# Altium PCB PCB2.PcbDoc
Units mm, origin at the board's own origin, x right, y up, seen from the top; angles counter-clockwise.
Board outline 73 x 48.5 mm, 2 copper layers (Top Layer, Bottom Layer); 64 components, 46 nets, 208 pads, 38 vias.
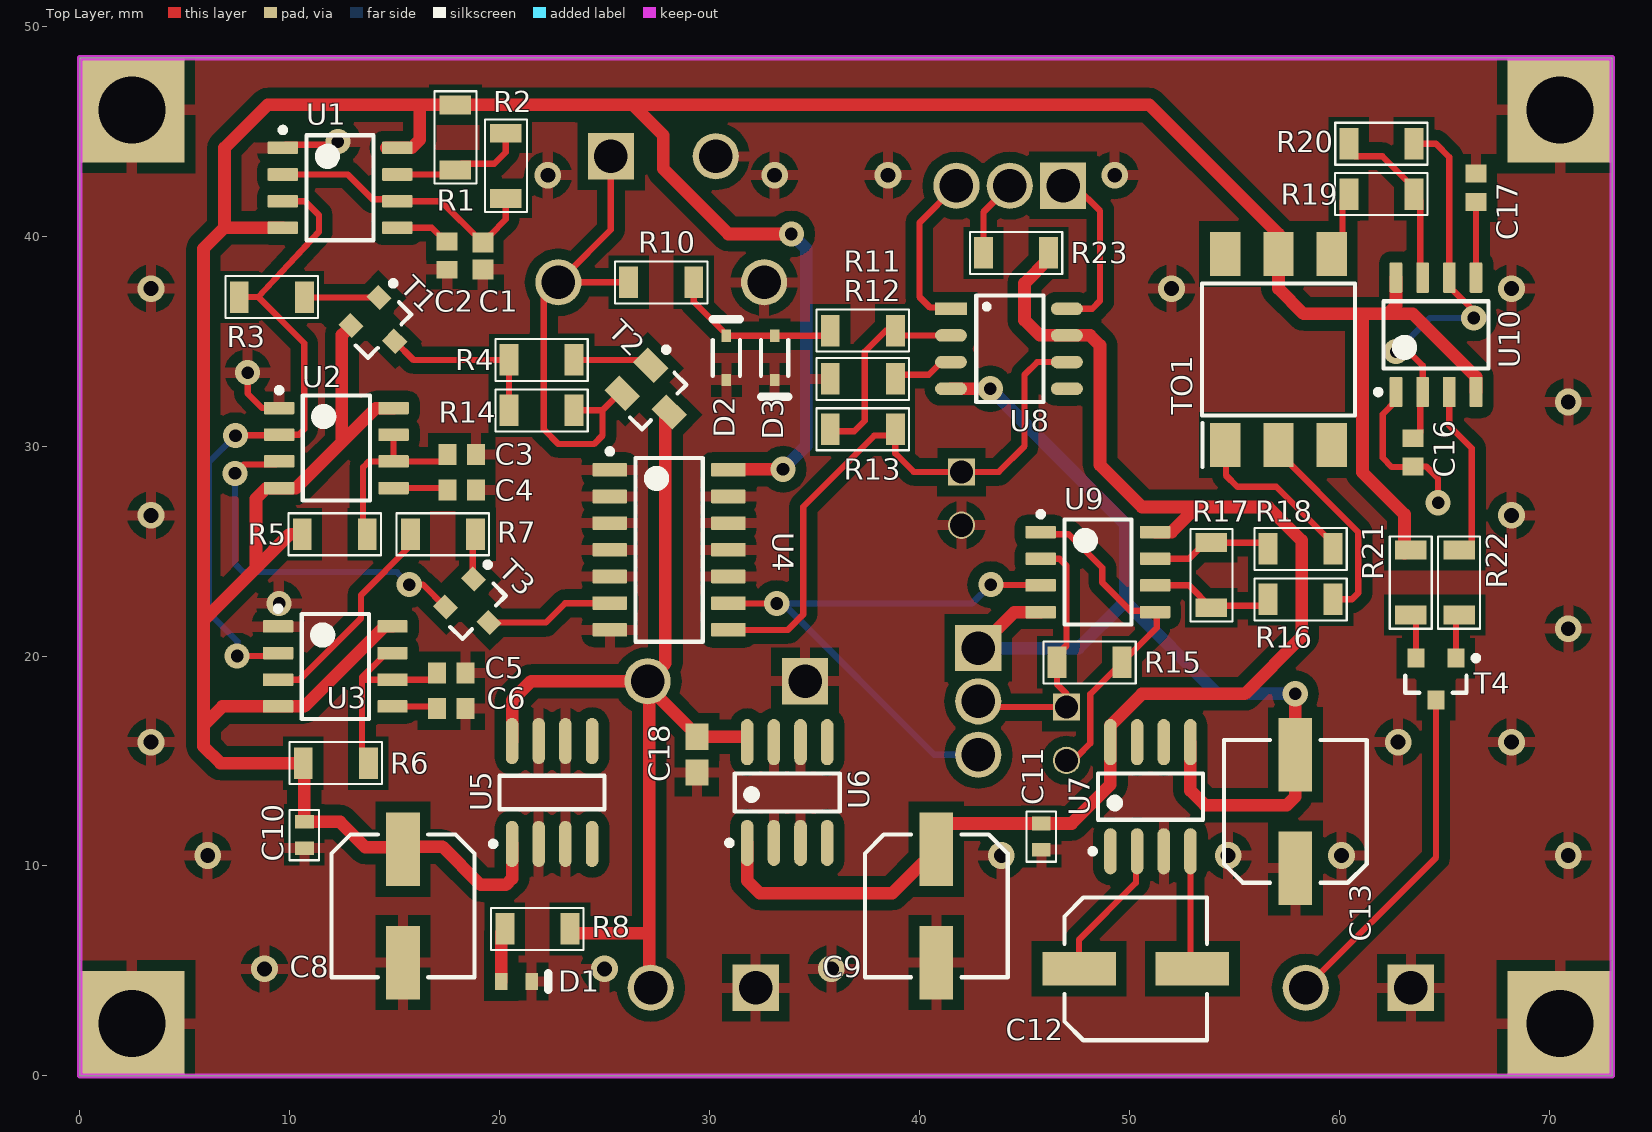
[diagram p0: Top Layer view]
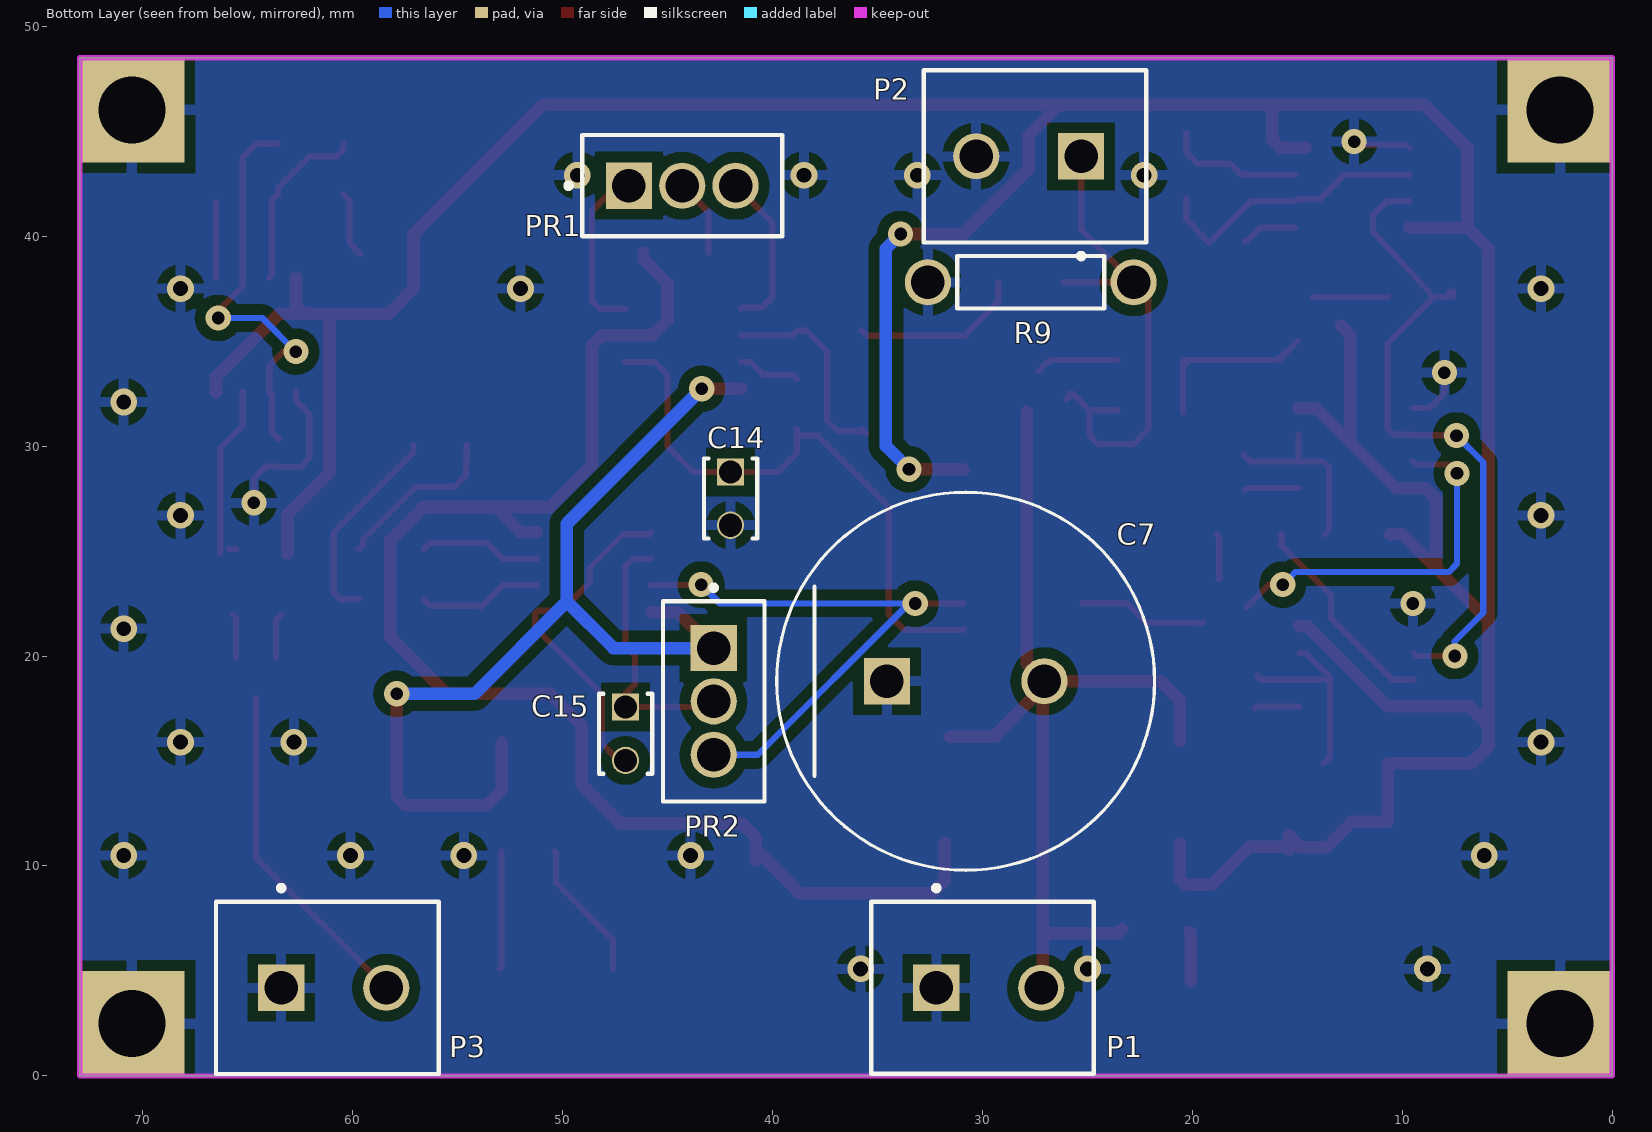
[diagram p1: Bottom Layer view, seen from below]
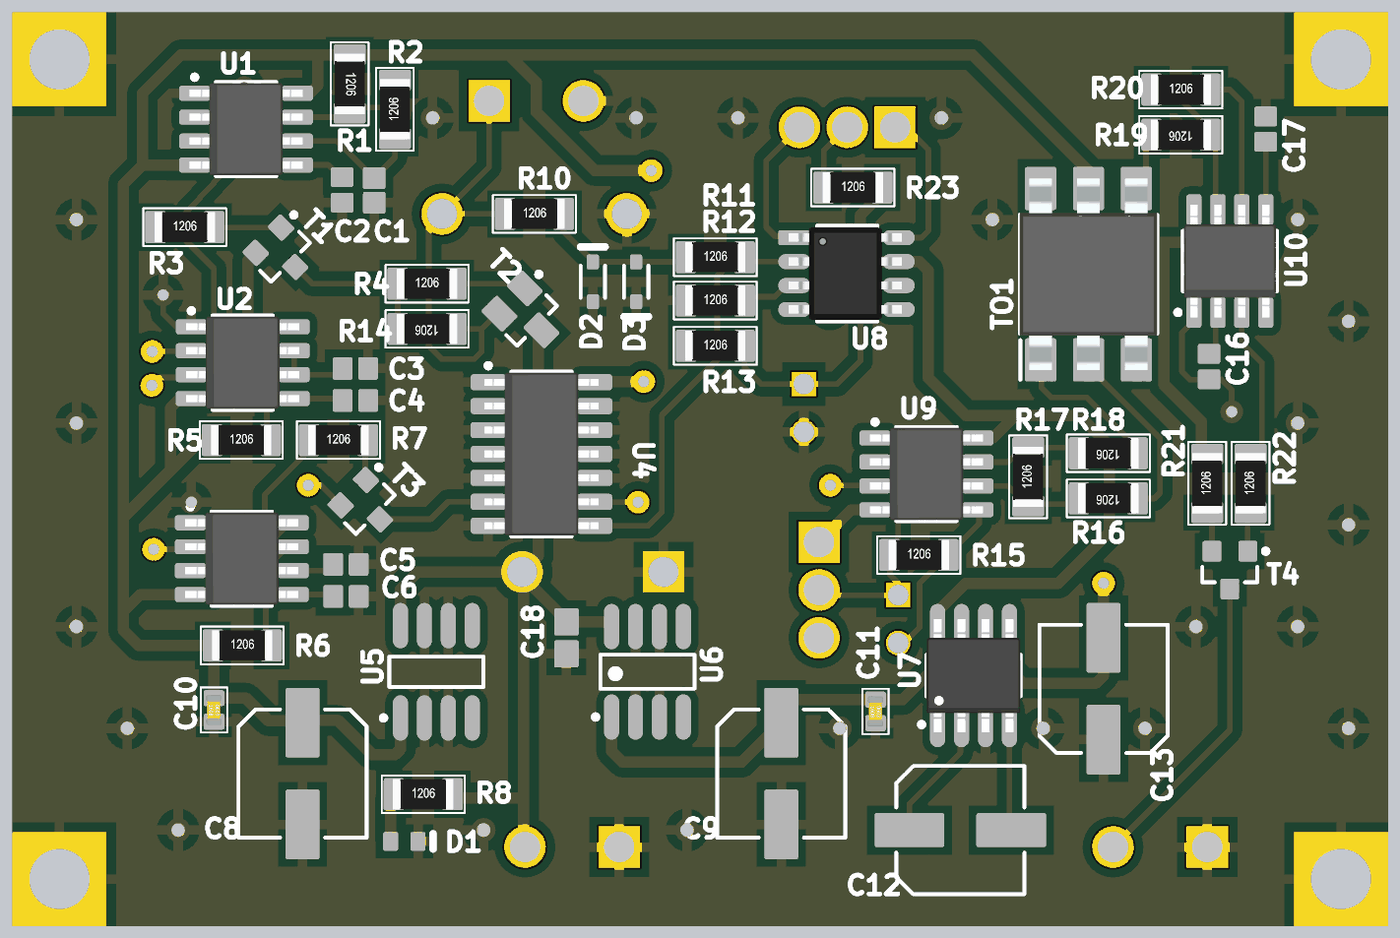
[diagram p2: 3D render of the assembled board from above, using the file's embedded part models]
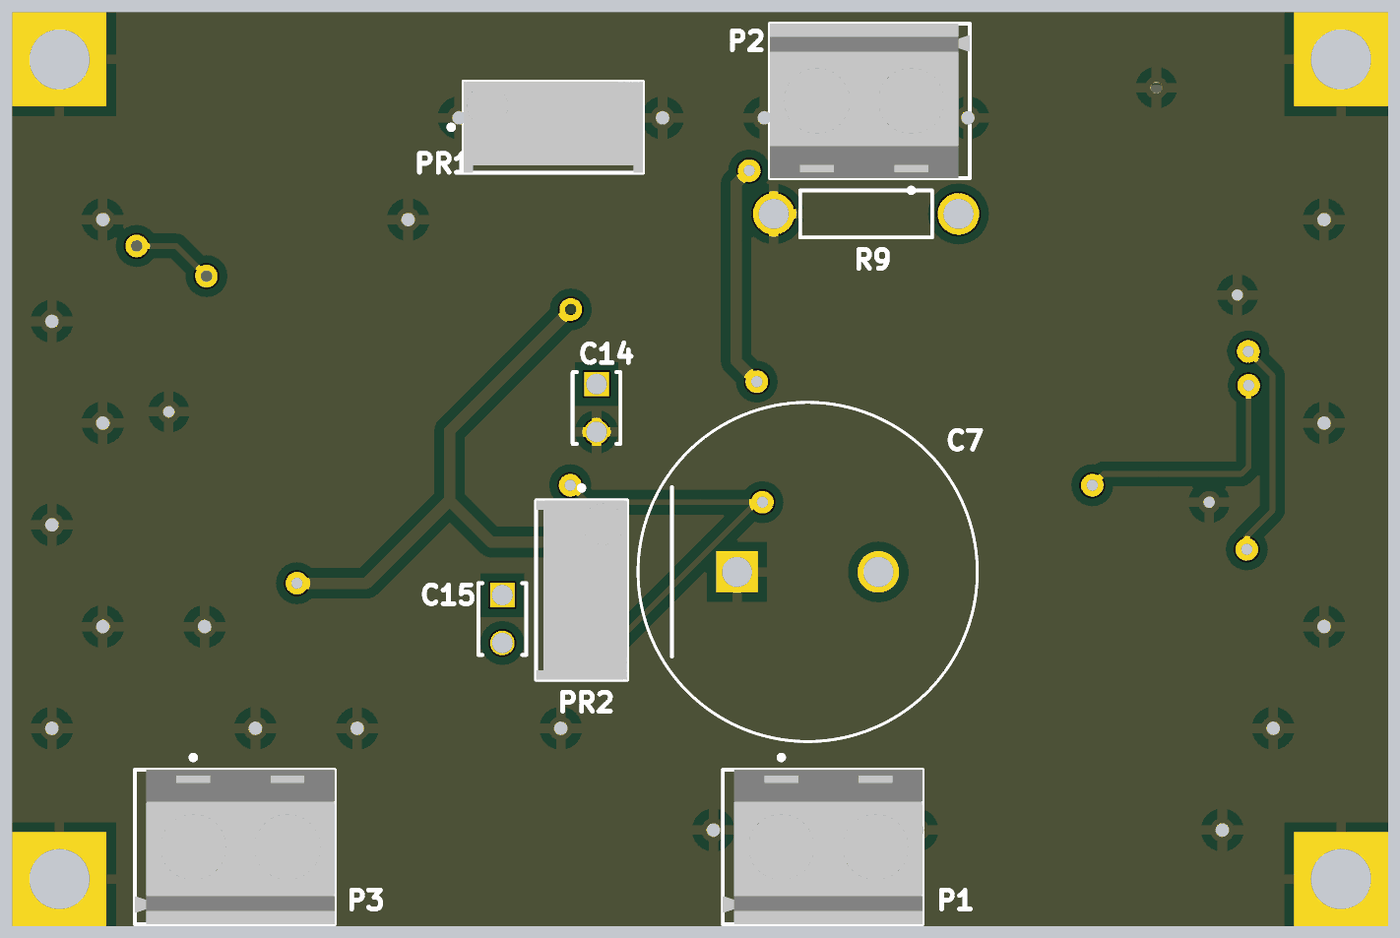
[diagram p3: 3D render of the assembled board from below, using the file's embedded part models]

## Layer stack, top to bottom
Top Solder: solder mask 0.0102, Solder Resist, Dk 3.5
Top Layer: signal copper 0.0356
Dielectric 1: dielectric 0.32, FR-4, Dk 4.8
Bottom Layer: signal copper 0.0356
Bottom Solder: solder mask 0.0102, Solder Resist, Dk 3.5

## Board outline
0,0 73,0 73,48.5 0,48.5

## Design rules (kind name [scope] priority, off if disabled: settings)
Clearance [All] p1: gap=0.508 ignorepadtopadclearanceinfootprint=TRUE except(0: Track-SMDPad Track-THPad Track-Hole)
HoleSize [All] p1: absolutevalues=TRUE maxlimit=6 minlimit=1 maxpercent=80.000 minpercent=20.000
HoleToHoleClearance [All] p1: gap=0.5 allowstackedmicrovias=TRUE
MinimumSolderMaskSliver [All] p1: minsoldermaskwidth=0.127
NetAntennae [All] p1: netantennaetolerance=0.1
PasteMaskExpansion [All] p1: expansion=0.1
PolygonConnect [All] p1: connectstyle=Relief reliefconductorwidth=0.5 reliefentries=4 polygonreliefangle="90 Angle" airgapwidth=0.5
RoutingVias [All] p1: holewidth=0.7 width=1.7 viastyle="Through Hole" minholewidth=0.6 minwidth=1.2 maxholewidth=1 maxwidth=2.2
SMDNeckDown [All] p1: percent=100.000
SilkToSilkClearance [All] p1: silktosilkclearance=0.1
SilkToSolderMaskClearance [IsPad] p1: minsilkscreentomaskgap=0.1 clearancetoexposedcopper=TRUE
SolderMaskExpansion [All] p1: expansion=0.102
Width [All] p1: maxlimit=5.08 minlimit=0.3 preferedwidth=0.762 minimp=50.000000 maximp=50.000000 favimp=50.000000
23 further rules are at their usual default settings.

## Classes and differential pairs
component class Designator: C7 C8 C9 C10 C11 C12 C13 C18 D1 P1 R8 U5 U6 U7

## Components (designator, comment, footprint, x,y, rotation, side; value= is the part's Value field where it differs from the comment)
C1 "VJ0603Y683KXJCW1BC" CAPC1608X95X40NL15T15 19.2,39.05 r90 top
C2 "VJ0603Y103KNAAO" CAPC1608X92X38NL15T08 17.5,39.075 r90 top
C3 "VJ0603Y103KNAAO" CAPC1608X92X38NL15T08 18.2,29.6 r180 top
C4 "VJ0603Y103KNAAO" CAPC1608X92X38NL15T08 18.2,27.9 r180 top
C5 "VJ0603Y103KNAAO" CAPC1608X92X38NL15T08 17.7,19.2 r180 top
C6 "VJ0603Y103KNAAO" CAPC1608X92X38NL15T08 17.7,17.5 r180 top
C7 "Cap Electrolytic" "18 X 25mm Radial 7.5mm" 30.8,18.8 r180 bottom
C8 "UUD1E470MCL1GS" NIC-CAPA2-6.3X5.8_V 15.4,8.1 r270 top
C9 "UUD1E470MCL1GS" NIC-CAPA2-6.3X5.8_V 40.8,8.1 r270 top
C10 "CL10B104KA8NNNC@TME" 0603 10.7,11.475 r270 top
C11 "CL10B104KA8NNNC@TME" 0603 45.8,11.4 r270 top
C12 "UUD1E470MCL1GS" NIC-CAPA2-6.3X5.8_V 50.3,5.1 r0 top
C13 "UUD1E470MCL1GS" NIC-CAPA2-6.3X5.8_V 57.9,12.6 r90 top
C14 "CC-470@TME" KEMT-C315-THT-2 42,27.5 r270 bottom
C15 "CM-220N@TME" KEMT-C315-THT-2 47,16.3 r270 bottom
C16 "VJ0603Y103KNAAO" CAPC1608X92X38NL15T08 63.5,29.7 r270 top
C17 "VJ0603Y103KNAAO" CAPC1608X92X38NL15T08 66.5,42.3 r90 top
C18 "0603YD334KAT2A" CAPC1608X90X35ML15T15 29.4,15.3 r270 top value=330nF
D1 "TLMS1000-GS08" VISH-TLMS1000_V 20.8,4.5 r0 top
D2 "1N4148" DIOD-SOD323-2-A_V 30.8,34.2 r90 top
D3 "1N4148" DIOD-SOD323-2-A_V 33.1,34.2 r270 top
P1 "282836-2@TME" TECO-282836-2_V 29.7,4.2 r180 bottom
P2 "282836-2 / SONDA" TECO-282836-2_V 27.8,43.8 r0 bottom
P3 "282836-2 / SPEAKER" TECO-282836-2_V 60.9,4.2 r180 bottom
PR1 "3296W-1-104LF@TME" BOUR-3296W 44.3,42.4 r180 bottom
PR2 "T910W-50R@TME" BOUR-3296W 42.8,17.84 r270 bottom
R1 "1206S4J0224T5E@TME" R1206 17.9,44.7 r270 top value=220K
R2 "1206S4J0222T5E@TME" R1206 20.3,43.35 r90 top value=2,2K
R3 "1206S4J0103T5E@TME" R1206 9.15,37.1 r0 top value=10K
R4 "1206S4J0220T5E@TME" R1206 22,34.1 r0 top value=22R
R5 "1206S4J0163T5E@TME" R1206 12.15,25.8 r0 top value=16K
R6 "1206S4J0123T5E@TME" R1206 12.2,14.9 r0 top value=12K
R7 "Resistor" R1206 17.3,25.8 r0 top value=10K
R8 "1206S4J0102T5E@TME" R1206 21.8,7 r0 top value=5K1
R9 "1W" OMTE-RES7X2.5-2 27.7,37.8 r180 bottom
R10 "Resistor" R1206 27.7,37.8 r0 top value=1K
R11 "Resistor" R1206 37.3,35.5 r0 top value=1K
R12 "Resistor" R1206 37.3,33.2 r0 top value=1K
R13 "Resistor" R1206 37.3,30.8 r0 top value=1K
R14 "1206S4J0102T5E@TME" R1206 22,31.7 r180 top value=1K
R15 "1206S4J0105T5E@TME" R1206 48.1,19.7 r0 top value=1M
R16 "1206S4J0102T5E@TME" R1206 58.15,22.7 r180 top value=1k
R17 "1206S4J0105T5E@TME" R1206 53.9,23.85 r90 top value=1M
R18 "1206S4J0271T5E@TME" R1206 58.15,25.1 r180 top value=270
R19 "1206S4J0103T5E@TME" R1206 62,42 r180 top value=10k
R20 "1206S4J0103T5E@TME" R1206 62,44.4 r0 top value=10K
R21 "1206S4J0220T5E@TME" R1206 63.4,23.5 r90 top value=22
R22 "1206S4J0103T5E@TME" R1206 65.7,23.5 r90 top value=10K
R23 "Resistor" R1206 44.6,39.2 r0 top value=1K
T1 "BC807" ONSC-SOT-23-3-318-08_V 14.3,35.7 r315 top
T2 "TN2540N8-G" FAIR-SOT23-3_A_V 27.3,32.4 r315 top
T3 "BC807-25LT1G" ONSC-SOT-23-3-318-08_V 18.8,22.3 r315 top
T4 "BC807" ONSC-SOT-23-3-318-08_V 64.6,18.9 r270 top
TO1 "CNY17" SOP254P1016X460-6N 57.1,34.6 r90 top
U1 "NE555D" D0008A_N 12.4,42.3 r0 top
U2 "NE555D" D0008A_N 12.225,29.905 r0 top
U3 "NE555D" D0008A_N 12.175,19.505 r0 top
U4 "CD4066BM96" D0014A_M 28.075,25.06 r0 top
U5 "L78L08ACD13TR@TME" SO8_M 22.5,13.5 r90 top
U6 "L78L05ABD13TR@TME" SO8_N 33.7,13.5 r90 top
U7 "ICL7660SCBA" INTS-SOIC-8_V 51,13.3 r90 top
U8 "NE5534" "NE5534 FIXED" 41.5,36.54 r0 top
U9 "TL062CDR" D0008A_N 48.5,24 r0 top
U10 "NE555D" D0008A_N 64.6,35.3 r90 top

## Footprints (in the part's own frame and the unit in brackets; to place one, negate y for a bottom-side part, rotate by r counter-clockwise, add the part's x,y. Pads: shape width x height; smd on the part's side, far side on the other; paste and mask are expansions set on the pad)
"18 X 25mm Radial 7.5mm" [mm] "(18 X 25mm) Radial 7.5mm Cap Aluminum 2200uF 35V 20% 2740mA 5000h 105°C Ammo Pack"
  rect 2.2x2.2 hole 1.6 paste-1000 mask+0: 1(-3.75,0)
  round 2.2 hole 1.6 paste-1000 mask+0: 2(3.75,0)
  silkscreen extent -9,-9 9,9
0603 [mm]
  rect 0.65x0.9 smd: 1(-0.625,0) 2(0.625,0)
  silkscreen extent -1.2,-0.7 1.2,0.7, body extent -0.8,-0.4 0.8,0.4, height 0.8
BOUR-3296W [mm] "THD, 3-Leads, Body 9.53x4.83mm, Pitch 2.54mm"
  rect 2.2x2.2 hole 1.6: 1(-2.54,0)
  round 2.2 hole 1.6: 2(0,0) 3(2.54,0)
  silkscreen extent -5.54,-2.41 4.77,2.42, body extent -4.76,-2.41 4.76,2.42, height 11.55
CAPC1608X90X35ML15T15 [mm] "Chip Capacitor, 2-Leads, Body 1.60x0.81mm, IPC Low Density"
  rect 1.25x1.1 smd: 1(-0.85,0) 2(0.85,0)
  body extent -0.88,-0.48 0.88,0.48, height 0.9
CAPC1608X92X38NL15T08 [mm] "Chip Capacitor, 2-Leads, Body 1.60x0.80mm, IPC Medium Density"
  rect 0.85x1 smd: 1(-0.675,0) 2(0.675,0)
  body extent -0.88,-0.48 0.88,0.48, height 0.92
CAPC1608X95X40NL15T15 [mm] "Chip Capacitor, 2-Leads, Body 1.60x0.80mm, IPC Medium Density"
  rect 0.95x1 smd: 1(-0.65,0) 2(0.65,0)
  body extent -0.87,-0.48 0.88,0.47, height 0.95
D0008A_N [mm] "SOIC, 8-Leads, Body 5x4mm, Pitch 1.27mm, IPC Medium Density"
  rrect17% 1.45x0.6 smd: 1(-2.725,1.905) 2(-2.725,0.635) 3(-2.725,-0.635) 4(-2.725,-1.905) 5(2.725,-1.905) 6(2.725,-0.635) 7(2.725,0.635) 8(2.725,1.905)
  silkscreen extent -2.85,-2.5 1.6,2.88, body extent -3,-2.45 3,2.45, height 1.63
D0014A_M [mm] "SOIC, 14-Leads, Body 8.75x4mm, Pitch 1.27mm, IPC Low Density"
  rrect15% 1.65x0.65 smd: 1(-2.825,3.81) 2(-2.825,2.54) 3(-2.825,1.27) 4(-2.825,0) 5(-2.825,-1.27) 6(-2.825,-2.54) 7(-2.825,-3.81) 8(2.825,-3.81) 9(2.825,-2.54) 10(2.825,-1.27) 11(2.825,0) 12(2.825,1.27) 13(2.825,2.54) 14(2.825,3.81)
  silkscreen extent -2.95,-4.38 1.6,4.81, body extent -3.02,-4.32 3.02,4.32, height 1.59
DIOD-SOD323-2-A_V [mm] "SOD-323, 2-Leads, Body 1.7x1.3mm"
  rect 0.59x0.45 smd: 1(-1.055,0) 2(1.055,0)
  silkscreen extent -0.85,-0.65 1.85,0.65, body extent -0.85,-0.65 0.85,0.65, height 1.2
FAIR-SOT23-3_A_V [mm] "SOT23, 3-Leads, Body 3.04x1.52mm, Pitch 0.95mm"
  rect 1.4x1 smd: 1(-1.1,0.95) 2(-1.1,-0.95) 3(1.1,0)
  silkscreen extent -1.22,-1.5 0.76,2.12, body extent -0.76,-1.52 0.76,1.52, height 1.12
INTS-SOIC-8_V [mm] "SOIC, 8-Leads, Body 5x4mm, Pitch 1.27mm"
  oval 2.2x0.6 smd: 1(-2.6,1.905) 2(-2.6,0.635) 3(-2.6,-0.635) 4(-2.6,-1.905) 5(2.6,-1.905) 6(2.6,-0.635) 7(2.6,0.635) 8(2.6,1.905)
  silkscreen extent -2.72,-2.5 1.1,2.88, body extent -3,-2.5 3,2.5, height 1.75
KEMT-C315-THT-2 [mm] "THD, 2-Leads, Body 3.81x2.54mm"
  rect 1.3x1.3 hole 1.1: 1(-1.27,0)
  round 1.3 hole 1.1: 2(1.27,0)
  silkscreen extent -1.91,-1.27 1.9,1.27, body extent -1.91,-1.27 1.91,1.27, height 4.66
"NE5534 FIXED" [mm]
  rect 1.52x0.6 smd: 1(0,0)
  oval 1.52x0.6 smd: 2(0,-1.27) 3(0,-2.54) 4(0,-3.81) 5(5.52,-3.81) 6(5.52,-2.54) 7(5.52,-1.27) 8(5.52,0)
  silkscreen extent 1.2,-4.44 4.4,0.64, body extent -0.3,-4.35 5.7,0.55, height 1.7
NIC-CAPA2-6.3X5.8_V [mm] "Aluminum Electrolytic Capacitor, Diameter 6.3mm, Height 6.1mm, Pitch 5.4mm"
  rect 3.5x1.6 smd: 1(-2.7,0) 2(2.7,0)
  silkscreen extent -3.4,-3.4 3.4,3.4, body extent -3.14,-3.12 3.14,3.15, height 6.1
OMTE-RES7X2.5-2 [mm] "Resistor, Axial; Body 7x2.5mm, Lead Dia. 0.6mm"
  round 2.2 hole 1.6: 1(-4.9,0) 2(4.9,0)
  silkscreen extent -3.5,-1.25 3.5,1.25, body extent -3.5,-1.25 3.5,1.24, height 2.5
ONSC-SOT-23-3-318-08_V [mm] "SOT23, 3-Leads, Body 2.92x1.3mm, Pitch 0.95mm"
  rect 0.9x0.8 smd: 1(-1,0.95) 2(-1,-0.95) 3(1,0)
  silkscreen extent -1.12,-1.46 0.65,2.02, body extent -0.65,-1.46 0.65,1.46, height 1.11
R1206 [mm]
  rect 0.9x1.5 smd: 1(-1.55,0) 2(1.55,0)
  silkscreen extent -2.2,-1 2.2,1, body extent -1.6,-0.8 1.6,0.8, height 0.6
SO8_M [mm] "SOIC, 8-Leads, Body 4.9x3.9mm, Pitch 1.27mm, IPC Low Density"
  oval 2.2x0.6 smd: 1(-2.45,1.905) 2(-2.45,0.635) 3(-2.45,-0.635) 4(-2.45,-1.905) 5(2.45,-1.905) 6(2.45,-0.635) 7(2.45,0.635) 8(2.45,1.905)
  silkscreen extent -2.57,-2.5 0.8,2.93, body extent -2,-2.5 2,2.5, height 1.75
SO8_N [mm] "SOIC, 8-Leads, Body 4.9x3.9mm, Pitch 1.27mm, IPC Medium Density"
  oval 2.2x0.6 smd: 1(-2.4,1.905) 2(-2.4,0.635) 3(-2.4,-0.635) 4(-2.4,-1.905) 5(2.4,-1.905) 6(2.4,-0.635) 7(2.4,0.635) 8(2.4,1.905)
  silkscreen extent -2.52,-2.5 0.9,2.88, body extent -2,-2.5 2,2.5, height 1.75
SOP254P1016X460-6N [mm]
  rect 2.1x1.45 smd: 1(-4.55,2.54) 2(-4.55,0) 3(-4.55,-2.54) 4(4.55,-2.54) 5(4.55,0) 6(4.55,2.54)
  silkscreen extent -5.6,-3.65 3.15,3.65, body extent -5.08,-3.65 5.08,3.65, height 4.6
TECO-282836-2_V [mm] "Female Header, Pitch 5mm, 1 x 2 Position, Height 10mm"
  rect 2.2x2.2 hole 1.6: 1(-2.5,0)
  round 2.2 hole 1.6: 2(2.5,0)
  silkscreen extent -5.6,-4.1 5,4.87, body extent -5.6,-4.1 5,4.1, height 10
VISH-TLMS1000_V [mm] "SMD, 2-Leads, Body 0.8x1.6mm"
  rect 0.6x0.8 smd: 1(-0.725,0) 2(0.725,0)
  silkscreen extent 1.52,-0.4 1.52,0.4, body extent -0.8,-0.4 0.8,0.4, height 0.65

## Part data
C1: library part CMP-2006-01832-1, Capacitance=68nF, Manufacturer=Vitramon, Part Number=VJ0603Y683KXJCW1BC
C2 C3 C4 C5 C6 C17: library part CMP-2006-01968-1, Capacitance=10nF, Manufacturer=Vitramon, Part Number=VJ0603Y103KNAAO
C7: "CAPACITOR ALUM 2200UF 20% 35V RADIAL", Capacitance=2200uF
C8 C9 C12 C13: library part CMP-0687-00039-1, "Aluminum Electrolytic Capacitor, UD Series, Low Impedance, 47 uF, 25 V, + / - 20%, -55 to 105 degC, Chip Type, 6.3 x 5.8 mm D x L, Pb-Free, Reel", Manufacturer=Nichicon, Rated Capacitance="47 uF", Rated Ripple Current (at 100kHz)="230 mA", Rated Voltage="25 V", Tolerance Rated Capacitance="-20 to 20%", ComponentLink1Description="Manufacturer URL", ComponentLink1URL=http://www.nichicon.co.jp/, ComponentLink2Description=Datasheet, ComponentLink2URL=http://products.nichicon.co.jp/en/pdf/XJA043/e-ud.pdf, ComponentLink3Description="Package Specification", ComponentLink3URL=http://products.nichicon.co.jp/en/pdf/XJA043/e-ud.pdf, DatasheetVersion=08/2012, Diameter="6.3 mm", Endurance Time="2000 h", Impedance="0.44 Ohm", Length="5.8 mm", Mounting Technology="Surface Mount", PackageDescription="2-Pin Surface Mount Device, Diameter 6.3 mm, Height 5.8 mm, Pitch 5.4 mm", PackageReference=CAPAE-D6.3H5.8, Packing="Dia382mm Reel", PartNumber=UUD1E470MCL1GS, RoHS=TRUE
C10 C11: library part Cap, "Capacitor", Capacitance=100nF
C14: library part CMP-1664-00008-1, "Capacitor, Ceramic, 22 pF, +/-10 %, 100 V, -55 to 125 degC, 2-Pin THD, RoHS, Bulk", Capacitance=470pF, Case\Package=TO-220, Max Input Voltage="40 V", Max Operating Temperature="125 degC", Max Ouput Current="1.5 A", Min Input Voltage="4.2 V", Min Operating Temperature="0 degC", Output Voltage="1.2 V", Package Quantity=50, ComponentLink1Description="Manufacturer URL", ComponentLink1URL=http://www.kemet.com/, ComponentLink2Description=Datasheet, ComponentLink2URL=http://capacitoredge.kemet.com/capedge2/DataSheet/Datasheet-C315C220K1G5TA.pdf?pn=C315C220K1G5TA{BULK}, DatasheetVersion=Aug-16, Height="9.28 mm", Length="10.28 mm", Mount="Through Hole", Output Current="1.5 A", Outputs=1, PackageDescription="2-Pin Through Hole Device, Body 3.81 x 2.54 mm", PackageReference=C315-THT-2, Packaging=Rail/Tube, Pins=3, Radiation Hardening=No, REACH SVHC="No SVHC", RoHSCompliant=true, Weight="0.08113 oz", Width="4.82 mm"
C15: library part CMP-1664-00008-1, "Model: C315C220K1G5TA", Capacitance=220nF, Case\Package=TO-220, Max Input Voltage="40 V", Max Operating Temperature="125 degC", Max Ouput Current="1.5 A", Min Input Voltage="4.2 V", Min Operating Temperature="0 degC", Output Voltage="1.2 V", Package Quantity=50, ComponentLink1Description="Manufacturer URL", ComponentLink1URL=http://www.kemet.com/, ComponentLink2Description=Datasheet, ComponentLink2URL=http://capacitoredge.kemet.com/capedge2/DataSheet/Datasheet-C315C220K1G5TA.pdf?pn=C315C220K1G5TA{BULK}, DatasheetVersion=Aug-16, Height="9.28 mm", Length="10.28 mm", Mount="Through Hole", Output Current="1.5 A", Outputs=1, PackageDescription="2-Pin Through Hole Device, Body 3.81 x 2.54 mm", PackageReference=C315-THT-2, Packaging=Rail/Tube, Pins=3, Radiation Hardening=No, REACH SVHC="No SVHC", RoHSCompliant=true, Weight="0.08113 oz", Width="4.82 mm"
C16: library part CMP-2006-01968-1, Capacitance=22nF, Manufacturer=Vitramon, Part Number=VJ0603Y103KNAAO
C18: library part CMP-2006-04538-1, Manufacturer="AVX Interconnect / Elco", Part Number=0603YD334KAT2A
D1: library part CMP-2000-07254-1, "Low Current LED, 40 mW, 1.8 V, -40 to 100 degC, 2-Pin SMD (0603), RoHS, Tape and Reel", Forward Current If=2mA, Forward Voltage=1.8V, LED Colour=Red, Manufacturer=Vishay, Package Description="2-Pin Surface Mount Device, Body 1.6 x 0.8 mm", Package Reference=TLMS1000, Automotive Qualification Standard=AEC-Q100, Bulb Size=1.6mmx0.8mm, Datasheet URL=https://datasheet.ciiva.com/5798/1698881-5798337.pdf, Datasheet Version="Rev. 1.7, 02/2011", LED Mounting=SMD, Lens Shape=Rectangular, Luminous Intensity=4mcd, Manufacturer URL=http://www.vishay.com/, Mounting Technology=SurfaceMount, MSL=MSL2-1year, Packaging=CutTape, Product Range=-, SVHC=ToBeAdvised, Viewing Angle=80°, Wavelength Typ=636nm
D2 D3: library part CMP-1667-00004-1, "1N4148WS-7-F / Fast Switching Diode, 75 V, 0.3 A, -65 to 150 degC, 2-Pin SOD323, RoHS, Tape and Reel", ComponentLink1Description="Manufacturer URL", ComponentLink1URL=http://www.diodes.com/, ComponentLink2Description=Datasheet, ComponentLink2URL=http://www.diodes.com/datasheets/ds30097.pdf, DatasheetVersion="Rev. 25-2, 03/2016", PackageDescription="2-Pin Small Outline Diode, Body 1.7 x 1.3 mm", PackageReference=SOD323-2
P1 P2 P3: library part CMP-1684-00017-1, "Female Header, Pitch 5 mm, 1 x 2 Position, Height 10 mm, Tail Length 3.5 mm, Rohs, Bulk", Color=Green, Current=13.5A, Manufacturer="TE Connectivity", Package Description="Female Header, Pitch 5 mm, 1 x 2 Position, Height 10 mm, Tail Length 3.5 mm", Package Reference=THD, Standard Package=300, Voltage=300V, 3D Model=282836-2.pdf, Category=Connectors,Interconnects, Clamp Material - Plating=Brass-NickelPlated, Contact Material - Plating=Brass-TinPlated, Datasheet URL=http://www.te.com.cn/commerce/DocumentDelivery/DDEController?Action=showdoc&DocId=Catalog+Section%7F1308389_EUROSTYLE_TERMINAL_BLOCKS%7F0607%7Fpdf%7FEnglish%7FENG_CS_1308389_EUROSTYLE_TERMINAL_BLOCKS_0607.pdf%7F282836-2, Dynamic Catalog=BuchananSeries, Family=TerminalBlocks-WiretoBoard, Featured Product=EurostyleTerminalBlockConnectors, Features=Interlocking(Side), Housing Material=Polyamide(PA66),Nylon6/6, Manufacturer URL=http://www.te.com, Mating Orientation=HorizontalwithBoard, Mounting Type=ThroughHole, Number of Levels=1, Other Names="5ULV-02B / A98076", Packaging=Bulk, Pitch="0.197\"(5.00mm)", Positions Per Level=2, Product Training Modules=Wire-to-BoardEurostyleTerminalBlocks, RoHS Information=282836-2StatementofCompliance, Screw Material - Plating=Brass-NickelPlated, Screw Thread=M3, Series=Buchanan, Torque - Screw=0.68Nm(6Lb-In), Wire Gauge=16-30AWG, Wire Termination=Screw-RisingCageClamp
PR1: library part CMP-1747-00001-1, "Square Trimpot(R) Trimming Potentiometer, 10 KOhm, +/- 10%, 0.5 W, -55 to 125 degC, 3-Pin THD, RoHS, Tube", Case\Package=0603, Case Code (Metric)=1608, Max Operating Temperature="155 degC", Min Operating Temperature="-55 degC", Package Quantity=5000, Power Rating="100 mW", Resistance=100k, Tolerance=1%, Type (Resistor)="Thick Film", Voltage Rating="75 V", Case Code (Imperial)=0603, ComponentLink1Description="Manufacturer URL", ComponentLink1URL=http://www.bourns.com/, ComponentLink2Description=Datasheet, ComponentLink2URL=http://www.bourns.com/docs/Product-Datasheets/3296.pdf, DatasheetVersion=May-16, Height="0.45 mm", Length="1.55 mm", Mount="Surface Mount", PackageDescription="3-Pin Through Hole Device, Body 9.53 x 4.83 mm, Pitch 2.54 mm", PackageReference=3296W, Packaging="Tape and Reel", Pins=2, Radiation Hardening=No, REACH SVHC=Unknown, RoHSCompliant=true, Weight="7.1E-05 oz", Width="0.85 mm"
PR2: library part CMP-1747-00001-1, "Square Trimpot(R) Trimming Potentiometer, 10 KOhm, +/- 10%, 0.5 W, -55 to 125 degC, 3-Pin THD, RoHS, Tube", Case\Package=0603, Case Code (Metric)=1608, Max Operating Temperature="155 degC", Min Operating Temperature="-55 degC", Package Quantity=5000, Power Rating="100 mW", Resistance=470, Tolerance=1%, Type (Resistor)="Thick Film", Voltage Rating="75 V", Case Code (Imperial)=0603, ComponentLink1Description="Manufacturer URL", ComponentLink1URL=http://www.bourns.com/, ComponentLink2Description=Datasheet, ComponentLink2URL=http://www.bourns.com/docs/Product-Datasheets/3296.pdf, DatasheetVersion=May-16, Height="0.45 mm", Length="1.55 mm", Mount="Surface Mount", PackageDescription="3-Pin Through Hole Device, Body 9.53 x 4.83 mm, Pitch 2.54 mm", PackageReference=3296W, Packaging="Tape and Reel", Pins=2, Radiation Hardening=No, REACH SVHC=Unknown, RoHSCompliant=true, Weight="7.1E-05 oz", Width="0.85 mm"
R1 R2 R3 R4 R8 R14 R15 R16 R17 R18 R19 R20 R21 R22: library part Res, "Resistor"
R5 R6: library part Res2, "Resistor", LatestRevisionDate=17-Jul-2002, LatestRevisionNote="Re-released for DXP Platform.", PackageDescription="Axial Device, Thru-Hole; 2 Leads; 0.4 in Pin Spacing", PackageReference=AXIAL-0.4, Published=8-Jun-2000, Publisher="Altium Limited"
R7 R10 R11 R12 R13 R23: library part Res
R9: library part CMP-2000-06865-1, Manufacturer=Ohmite, Operating Temperature=-, Package / Case=Axial, Package Description="2-Pin THD Resistor, Body 7 x 2.5 mm, Lead Dia. 0.6 mm", Package Reference=RES7X2.5, PartNumber=OD103JE, Power (Watts)=0.25W,1/4W, Power Rating=0.25W, Resistance (Ohms)=1k, Standard Package=100, Tolerance=±5%, Catalog Drawings=OD,OF,OASeries, Category=Resistors, Composition=CarbonComposition, Datasheet URL=http://www.ohmite.com/cat/res_od_of_oa.pdf, Datasheet Version=06/2016, EDA / CAD Models=DownloadfromAcceleratedDesigns, Family=ThroughHoleResistors, Features=PulseWithstanding, Height=-, Manufacturer URL=http://www.ohmite.com/, Mounting Technology=ThroughHole, Number of Terminations=2, Online Catalog=OD,OF,OASeries,LittleDemon®, Packaging=Bulk, RoHS Information="LittleDemon\"E\"SeriesMaterialDeclaration", Series=LittleDemon®OD, Size / Dimension="0.098\"Diax0.276\"L(2.50mmx7.00mm)", Supplier Device Package=Axial, Temperature Coefficient=-
T1 T4: library part CMP-1048-00691-1, "General Purpose Transistor, PNP Silicon, 3-Pin SOT-23, Pb-Free, Tape and Reel", Manufacturer="On Semiconductor", PartNumber=BC807-25LT1G, ComponentLink1Description="Manufacturer URL", ComponentLink1URL=http://www.onsemi.com/, ComponentLink2Description=Datasheet, ComponentLink2URL=http://www.onsemi.com/pub_link/Collateral/BC807-16LT1-D.PDF, ComponentLink3Description="Package Specification", ComponentLink3URL=http://www.onsemi.cn/pub_link/Collateral/318-08.PDF, DatasheetVersion="Rev. 10", fT Min (MHz)=100, IC Continuous (A)=-0.5, Mounting Technology="Surface Mount", PackageDescription="3-Pin Small Outline Transistor, Body 2.92 x 1.3 mm, Pitch 0.95 mm", PackageReference=SOT-23-3-318-08, PackageVersion="Rev. AP, 11/2009", Packing="Tape and Reel", Polarity=PNP, RoHS=TRUE
T2: library part CMP-2000-06254-1, "N-Channel Logic Level PowerTrench(TM) MOSFET, 30 V, 2.7 A, -55 to 150 degC, 3-Pin SOT23, RoHS, Tape and Reel", Manufacturer=FairchildSemiconductor, Maximum Continuous Drain Current=2.7A, Maximum Drain Source Voltage=30V, Maximum Gate Source Voltage=±20V, Operating Temperature=-55to150°C, Package=3SuperSOT, Package Description="3-Pin Small Outline Transistor, Body 2.92 x 1.4 mm, Pitch 0.95 mm", Package Reference=SOT23-3, Category=MOSFET, Channel Mode=Enhancement, Channel Type=N, Datasheet URL=https://www.fairchildsemi.com/datasheets/FD/FDN359AN.pdf, Datasheet Version="Rev. C, 04/1999", Manufacturer URL=https://www.fairchildsemi.com/, Mounting=SurfaceMount, Mounting Technology=SurfaceMount, Package URL=https://www.fairchildsemi.com/package-drawings/MA/MA03B.pdf, Packaging=Tape&Reel, Rad Hard=No, RDS-on=46@10VmOhm, Typical Fall Time=4ns, Typical Rise Time=13ns, Typical Turn-Off Delay Time=15ns, Typical Turn-On Delay Time=6ns
T3: library part CMP-1048-00691-1, "General Purpose Transistor, PNP Silicon, 3-Pin SOT-23, Pb-Free, Tape and Reel", Manufacturer="On Semiconductor", ComponentLink1Description="Manufacturer URL", ComponentLink1URL=http://www.onsemi.com/, ComponentLink2Description=Datasheet, ComponentLink2URL=http://www.onsemi.com/pub_link/Collateral/BC807-16LT1-D.PDF, ComponentLink3Description="Package Specification", ComponentLink3URL=http://www.onsemi.cn/pub_link/Collateral/318-08.PDF, DatasheetVersion="Rev. 10", fT Min (MHz)=100, IC Continuous (A)=-0.5, Mounting Technology="Surface Mount", PackageDescription="3-Pin Small Outline Transistor, Body 2.92 x 1.3 mm, Pitch 0.95 mm", PackageReference=SOT-23-3-318-08, PackageVersion="Rev. AP, 11/2009", Packing="Tape and Reel", PartNumber=BC807-25LT1G, Polarity=PNP, RoHS=TRUE
TO1: library part CNY17-3-300E, "Optocoupler DC i/p Transistor o/p DIP6GW Avago CNY17-3-300E DC Input Transistor Output Optocoupler, Surface Mount, 6-Pin PDIP", Manufacturer_Name="Avago Technologies", Mouser Part Number=630-CNY17-3-300E, Datasheet Link=https://componentsearchengine.com/Datasheets/2/CNY17-3-300E.pdf, Geometry.Height=4.6mm, Manufacturer_Part_Number=CNY17-3-300E, Mouser Price/Stock=https://www.mouser.com/Search/Refine.aspx?Keyword=630-CNY17-3-300E
U1 U2 U3 U10: library part CMP-2000-06840-1, "Precision Timer, 4.5 to 16 V, 0 to 70 degC, 8-Pin SOIC (D), Green (RoHS & no Sb/Br), Tube", Digital IC Case Style=SOIC, Frequency=500kHz, IC Temperature Range=Commercial, Manufacturer="Texas Instruments", Operating Frequency Max=0.5MHz, Operating Mode=Astable,Monostable, Operating Temperature Max=70°C, Operating Temperature Min=0°C, Operating Temperature Range=0°Cto+70°C, Package Description="8-Pin Small Outline Integrated Circuit, Body 4.9 x 3.9 mm, Pitch 1.27 mm", Package Reference=D8, PartNumber=NE555, Supply Voltage Max=16V, Supply Voltage Min=4.5V, Supply Voltage Range=4.5Vto16V, Base Number=555, Clock External Input=No, Datasheet URL=http://www.ti.com/general/docs/lit/getliterature.tsp?genericPartNumber=NE555&fileType=pdf, Datasheet Version="Rev. I, 09/2014", Device Marking=NE555D, IC Generic Number=555, Logic Function Number=555, Manufacturer URL=http://www.ti.com/, Mounting Technology=SurfaceMount, No. of Channels=1, No. of Pins=8, No. of Timers=1, Package / Case=SOIC, Package URL=http://www.ti.com/lit/ml/msoi002j/msoi002j.pdf, SVHC=NoSVHC(19-Dec-2012)
U4: library part CMP-1574-00003-3, "CMOS Quad Bilateral Switch, D0014A, LARGE T&R", Generic Part Number=CD4066B, Manufacturer="Texas Instruments", Operating Temperature Range(C)="-55 to 125", Rating=Military, Bandwidth(Max)(MHz)=40, Code_JEDEC=MS-012, Configuration="4 X SPST (NO)", Crosstalk=Yes, DatasheetVersion=SCHS051D, ICC(Typ)(mA)=0.00002, Output Type=CMOS, PackageReference=D0014A, PackageVersion=http://www.ti.com/lit/ml/mpds177g/mpds177g.pdf, Ron(Max)(Ohms)=240, Ron(Typ)(Ohms)=125, VCC(Max)(V)=18, VCC(Min)(V)=3
U5: library part CMP-0244-00234-1, "Positive Voltage Regulator, 8V, 8-Pin SO, Tape and Reel", Code_IPC=SOIC127P600-8, Code_JEDEC=MS-012-AA, ComponentLink1Description="Manufacturer URL", ComponentLink1URL=http://www.st.com, ComponentLink2Description=Datasheet, ComponentLink2URL=http://www.st.com/internet/com/TECHNICAL_RESOURCES/TECHNICAL_LITERATURE/DATASHEET/CD00000446.pdf, ComponentLink3Description="Package Specification", ComponentLink3URL=http://www.st.com/internet/com/TECHNICAL_RESOURCES/TECHNICAL_LITERATURE/PACKAGE_INFORMATION/CD00004680.pdf, DatasheetVersion=1/02/2011, PackageDescription="8-Pin Small Outline Integrated Circuit 1.27 mm Pitch", PackageReference=SO8, PackageVersion=1/12/2002
U6: library part CMP-0244-00242-1, "Positive Voltage Regulator, 5V, 8-Pin SO, Tape and Reel", Code_IPC=SOIC127P600-8, Code_JEDEC=MS-012-AA, ComponentLink1Description="Manufacturer URL", ComponentLink1URL=http://www.st.com, ComponentLink2Description=Datasheet, ComponentLink2URL=http://www.st.com/internet/com/TECHNICAL_RESOURCES/TECHNICAL_LITERATURE/DATASHEET/CD00000446.pdf, ComponentLink3Description="Package Specification", ComponentLink3URL=http://www.st.com/internet/com/TECHNICAL_RESOURCES/TECHNICAL_LITERATURE/PACKAGE_INFORMATION/CD00004680.pdf, DatasheetVersion=1/02/2011, PackageDescription="8-Pin Small Outline Integrated Circuit 1.27 mm Pitch", PackageReference=SO8, PackageVersion=1/12/2002
U7: library part CMP-2000-06437-1, "Charge Pump Switching Regulator IC Positive or Negative Fixed, 1.5 to 12 V, 0 to 70 degC, RoHS, Tube", Current - Output=45mA, Frequency - Switching=10kHz,35kHz, Manufacturer=Intersil, Operating Temperature=0°C~70°C, Package / Case="8-SOIC(0.154\",3.90mmWidth)", Package Description="8-Pin Small Outline Integrated Circuit, Body 4.9 x 3.9 mm, Pitch 1.27 mm", Package Reference=SOIC-8, Standard Package=98, Supplier Device Package=8-SOIC, Voltage - Input=1.5V~12V, Voltage - Output=-1.5V~-12V,±3V~±24V, Category=IntegratedCircuits(ICs), Datasheet URL=http://www.intersil.com/content/dam/intersil/documents/icl7/icl7660s-a.pdf, Datasheet Version=01/2013, Dynamic Catalog=InvertingIC, Family=PMIC-VoltageRegulators-DCDCSwitchingRegulators, Manufacturer URL=http://www.intersil.com/en.html, Mounting Technology=SurfaceMount, Mounting Type=SurfaceMount, Number of Outputs=1, Output Type=Adjustable, Package URL=http://www.intersil.com/content/dam/Intersil/documents/m8_1/m8.15.pdf, Packaging=Tube, PWM Type=-, Series=-, Synchronous Rectifier=No, Type=SwitchedCapacitor(ChargePump),Doubler,Inverting
U9: library part CMP-0017-00600-2, "Dual Low-Power JFET-Input General-Purpose Operational Amplifier, 7 to 36 V, 0 to 70 degC, 8-pin SOIC (D8), Green (RoHS & no Sb/Br)", Manufacturer="Texas Instruments", Rating=Catalog, Total Supply Voltage(Max)(+5V is 5, +/-5V is 10)=36, Total Supply Voltage(Min)(+5V is 5, +/-5V is 10)=7, CMRR(Min)(dB)=70, Code_JEDEC=MS-012, ComponentLink1Description="Manufacturer URL", ComponentLink1URL=http://www.ti.com/, ComponentLink2Description=Datasheet, ComponentLink2URL=http://www.ti.com/lit/ds/symlink/tl062.pdf, ComponentLink3Description="Package Specification", ComponentLink3URL=http://www.ti.com/litv/pdf/msoi002j, DatasheetVersion=SLOS078J, Eco-Plan="Green (RoHS & no Sb/Br)", GBW(Typ)(MHz)=1, IIB(Max)(pA)=400, Iq per channel(Max)(mA)=0.25, Mounting Technology="Surface Mount", Number of Channels=2, Offset Drift(Typ)(uV/C)=10, PackageDescription="8-Pin Plastic Small Outline, Body 4.9 x 3.9 mm, Pitch 1.27 mm", PackageReference=D0008A, PackageVersion="4040047-3/M, 06/2011", PartNumber=TL062CDR, Slew Rate(Typ)(V/us)=3.5, Sub Family="General Purpose Amplifier, High Supply Voltage Amplifier (>=30V), Low Power Amp (<=500uA)", Vio (25C)(Max)(mV)=15, Vn at 1kHz(Typ)(nV/rtHz)=42

## Free pads (board coordinates)
  rect 5x5 hole 3.2 paste-1000 mask+0: 92(2.5,2.5) 92(2.5,46) 92(70.5,2.5) 92(70.5,46)

## Via types
v1: diameter 1.27, hole 0.711, Top Layer to Bottom Layer, tented both sides, 22 vias
v2: diameter 1.2, hole 0.6, Top Layer to Bottom Layer, 12 vias
v3: diameter 1.2, hole 0.6, Top Layer to Bottom Layer, tented both sides, 4 vias

## Nets (pads, with @x,y where several pads share a name; then routed paths per layer and width w, separated by ;. In a path a pad name is that pad's centre, name@x,y a point inside that pad or via, vN(x,y) a via of type N, cw(c..) or ccw(c..) an arc to the next point about the centre after c; other vN are vias at no path point)
+5: C9.1 C11.1 R23.2 U6.1 U7.8 U8.7 U9.8 | length 67.7
  Top Layer w0.6: U6.1 31.795,9.305 32.4,8.7 38.7,8.7 40.525,10.525 40.8,10.25 C9.1 40.8,11.375 41.45,12.025 C11.1 47.249,12.025 49.095,13.871 U7.8 49.095,16.7 50.595,18.2 55.5,18.2 58.2,20.9 58.2,25.503 56.603,27.1 53.2,27.1 ; R23.2 46.15,38.9 45,37.75 45,36 45.73,35.27 U8.7 48.13,35.27 48.6,34.8 48.6,29.1 50.6,27.1 53.2,27.1 ; U9.8 52.005,25.905 53.2,27.1
+8: C8.1 C10.1 R1.1 R5.1 R6.1 R21.2 T1.2 TO1.5 U1.4 U1.8 U2.4 U2.8 U3.4 U3.8 U4.14 U5.1 U10.4 U10.8 | length 199.2
  Top Layer w0.6: U1.4 8.202,40.395 8.197,40.4 6.9,40.4 ; R5.1 10,25.8 8.4,24.2 ; T1.2 12.486,35.3 12.486,30.214 12.5,30.2 ; U1.8@14.605,44.205 U1.8 15.805,44.205 16.2,44.6 16.2,46.25 ; U3.8 14.51,21.41 10.7,17.6 U3.4 6.8,17.6 5.9,16.7 ; U2.8 14.11,31.81 12.5,30.2 ; U5.1 20.595,9.395 20.3,9.1 19.1,9.1 17.275,10.925 15.525,10.925 C8.1 15.4,11.45 14.85,10.9 13.6,10.9 12.4,12.1 C10.1 10.7,14.85 R6.1 6.7,14.9 5.9,15.7 5.9,16.7 ; U4.14 30.93,28.9 v2(33.5,28.9) ; v2(33.9,40.1) 30.9,40.1 27.8,43.2 27.8,44.8 26.35,46.25 ; 61.2,36.3 62.3,36.3 ; U10.8 62.695,36.695 62.3,36.3 ; R21.2@63.1,24.9 63.1,26.75 61.1,28.75 61.1,36.3 58.3,36.3 57.1,37.5 TO1.5 57.1,40.1 50.95,46.25 26.35,46.25 ; U10.4 66.505,33.295 63.5,36.3 62.3,36.3 ; 5.9,16.7 5.9,21.7 ; 5.9,21.7 5.9,39.4 6.9,40.4 ; 5.9,21.7 8.4,24.2 ; 6.9,40.4 6.9,44.2 8.95,46.25 16.2,46.25 ; 8.4,24.2 8.4,27.5 8.9,28 U2.4 10.3,28 12.5,30.2 ; 16.2,46.25 R1.1 26.35,46.25
  Bottom Layer w0.6: v2(33.5,28.9) 34.6,30 34.6,39.4 v2(33.9,40.1)
+12: C7.2 C18.1 P1.2 R8.2 T2.3 U5.8 U6.8 | length 45.8
  Top Layer w0.6: U5.8 20.595,17.895 21.5,18.8 26.85,18.8 27.125,18.525 C7.2@27.125,18.5 ; R8.2 23.55,6.8 27.125,6.8 ; C7.2 27.9,19.65 T2.3@27.9,31.622 ; P1.2 27.125,4.275 27.125,6.8 ; U6.8@31.545,16.15 C18.1 29.4,16.225 C7.2@27.125,18.5 ; 27.125,6.8 C7.2@27.125,18.5
-5: C13.2 PR2.1 U7.5 U8.4 U9.4 | length 48.8
  Top Layer w0.6: U8.4 v2(43.37,32.73) ; PR2.1 44.515,22.095 U9.4 ; U7.5 52.905,13.595 53.6,12.9 57.5,12.9 57.9,13.3 C13.2 v2(57.9,18.2)
  Bottom Layer w0.6: PR2.1 47.58,20.38 49.8,22.6 ; v2(43.37,32.73) 49.8,26.3 49.8,22.6 ; v2(57.9,18.2) 54.2,18.2 49.8,22.6
GND: C1.1 C2.1 C3.1 C4.1 C5.1 C6.1 C7.1 C8.2 C9.2 C10.2 C11.2 C13.1 C14.2 C16.2 C17.2 C18.2 D1.2 D2.1 D3.2 P1.1 P2.2 P3.1 pad.92 R9.1 R12.1 U1.1 U2.1 U3.1 U4.1 U4.2 U4.3 U4.4 U4.5 U4.7 U4.10 U4.11 U4.12 U4.13 U5.2 U5.3 U5.6 U5.7 U6.2 U6.3 U6.6 U6.7 U7.3 U10.1 | length 13.2
  Top Layer w0.3: v3(8,33.5) 8,32.5 8.69,31.81 U2.1 ; U1.1 9.823,44.352 12.152,44.352 v3(12.3,44.5) ; U10.1 62.695,32.15 62.058,31.513 62.058,29.442 62.5,29 63.475,29 C16.2 64.133,29.025 64.7,28.458 v3(64.7,27.3)
  other v1: 8.8,5.1 25,5.1 35.8,5.1 6.1,10.5 43.9,10.5 54.7,10.5 60.1,10.5 70.9,10.5 3.4,15.9 62.8,15.9 68.2,15.9 70.9,21.3 3.4,26.7 68.2,26.7 70.9,32.1 3.4,37.5 52,37.5 68.2,37.5 22.3,42.9 33.1,42.9 38.5,42.9 49.3,42.9
  other v3: 9.5,22.5
NetC1_2: C1.2 R2.1 U1.2 U1.6 | length 13.4
  Top Layer w0.3: U1.2 12.765,42.935 13.95,41.75 15.04,41.75 U1.6 17.21,41.665 19.175,39.7 C1.2 19.225,39.7 19.55,40.025 19.55,40.05 20.3,40.8 R2.1
NetC2_2: C2.2 U1.5 | length 2.6
  Top Layer w0.3: U1.5 15.13,40.4 16.775,40.4 17.425,39.75 C2.2
NetC3_2: C3.2 R5.2 U2.6 U2.7 | length 8.9
  Top Layer w0.3: R5.2 13.5,26 13.5,29 13.77,29.27 U2.6 ; U2.7 U2.6 ; C3.2 17.525,29.545 17.25,29.27 U2.6
NetC4_2: C4.2 U2.5 | length 2.6
  Top Layer w0.3: U2.5 17.425,28 C4.2
NetC5_2: C5.2 R6.2 U3.6 U3.7 | length 9.7
  Top Layer w0.3: R6.2 13.45,15.2 13.45,18.995 ; U3.7 14.595,20.14 13.45,18.995 ; C5.2@16.89,19.065 16.89,19.01 16.75,18.87 U3.6 13.575,18.87 13.45,18.995
NetC6_2: C6.2 U3.5 | length 2.2
  Top Layer w0.3: U3.5 16.925,17.6 C6.2
NetC12_1: C12.1 U7.2 | length 6.7
  Top Layer w0.3: C12.1 47.6,6.5 50.308,9.208 50.308,10.643 U7.2
NetC12_2: C12.2 U7.4 | length 5.6
  Top Layer w0.3: U7.4 52.905,5.195 C12.2
NetC14_1: C14.1 R13.2 U4.8 U8.6 | length 28.4
  Top Layer w0.3: U4.8 30.908,21.242 33.721,21.242 34.458,21.979 34.458,27.115 37.843,30.5 38.85,30.5 38.85,29.65 39.73,28.77 C14.1 43.77,28.77 45,30 45,33.4 45.6,34 U8.6 ; R13.2@38.85,30.7 R13.2
NetC15_1: C15.1 PR2.2 R15.1 U9.2 | length 12.6
  Top Layer w0.3: PR2.2 43.07,17.57 C15.1 ; U9.2 46.665,24.635 47,24.3 47,20.5 46.55,20.05 R15.1 46.55,18.65 47,18.2 47,18.11 C15.1@46.73,17.84
NetC15_2: C15.2 R15.2 U9.1 U9.5 | length 16.5
  Top Layer w0.3: U9.1 45.88,25.8 47.1,25.8 48.7,24.2 48.7,23.5 50.05,22.15 51.17,22.15 U9.5 51.3,22.02 51.3,21.35 R15.2 48.137,18.187 48.137,15.837 47.5,15.2 47.17,15.2 C15.2
NetC16_1: C16.1 R20.2 U10.2 U10.6 | length 19.7
  Top Layer w0.3: v2(62.7,34.5) 63.3,34.5 63.965,33.835 U10.2 63.85,32.46 63.85,30.65 63.575,30.375 C16.1 ; R20.2 64.6,44.4 65.235,43.765 U10.6 65.235,37.6 66.228,36.607 66.228,36.272 v2(66.4,36.1)
  Bottom Layer w0.3: v2(62.7,34.5) 64.3,36.1 v2(66.4,36.1)
NetC17_1: C17.1 U10.5 | length 3.6
  Top Layer w0.3: C17.1 66.505,41.62 U10.5
NetD1_1: D1.1 R8.1 | length 2.6
  Top Layer w0.3: R8.1@20.075,6.825 R8.1
  Top Layer w0.6: D1.1 R8.1@20.075,6.825
NetD2_2: D2.2 D3.1 R10.2 R11.1 | length 8.2
  Top Layer w0.3: R10.2 29.25,36.875 30.8,35.325 D2.2 D3.1 35.505,35.255 R11.1
NetP2_1: P2.1 R9.2 R10.1 R14.1 T2.2 | length 25.3
  Top Layer w0.3: R9.2@22.55,37.65 R9.2@22.65,37.65 ; R14.1 24.903,31.7 ; P2.1 25.3,40.3 23.15,38.15 R9.2@23.5,37.8 ; T2.2 T2.2@25.85,32.365 ; T2.2@25.992,32.223 T2.2@25.85,32.365 ; R10.1 R9.2@23.5,37.8 ; R9.2@22.65,37.65 22.1,37.1 22.1,30.8 22.8,30.1 24.5,30.1 24.903,30.503 24.903,31.7 ; R9.2@22.65,37.65 R9.2 R9.2@23.5,37.8 ; 24.903,31.7 25.709,32.506 T2.2@25.85,32.365
NetP3_2: P3.2 T4.3 | length 16.4
  Top Layer w0.3: P3.2 64.6,10.4 T4.3 T4.3@64.6,18
NetPR1_1: PR1.1 U8.8 | length 8.3
  Top Layer w0.3: PR1.1 47.4,42.4 48.6,41.2 48.6,36.916 48.224,36.54 U8.8
NetPR1_2: PR1.2 R23.1 | length 3.7
  Top Layer w0.3: R23.1 43.05,41.15 PR1.2
NetPR1_3: PR1.3 U8.1 | length 7.8
  Top Layer w0.3: U8.1 41.44,36.6 40.5,36.6 40,37.1 40,40.64 PR1.3
NetPR2_3: PR2.3 U4.9 U9.3 | length 27.6
  Top Layer w0.3: U4.9 30.92,22.5 v2(33.2,22.5) ; v2(43.4,23.4) 43.418,23.382 45.757,23.382 U9.3
  Bottom Layer w0.3: v2(33.2,22.5) v2@33.5,22.5 ; PR2.3 40.7,15.3 v2@33.5,22.5 ; v2(43.4,23.4) 42.5,22.5 v2@33.5,22.5
NetR1_2: R1.2 R2.2 U1.7 | length 6.5
  Top Layer w0.3: U1.7 17.685,42.935 R1.2 18.2,43.45 19.75,43.45 20.3,44 R2.2
NetR3_1: R3.1 U1.3 U2.2 U3.2 | length 33.3
  Top Layer w0.3: v2(7.421,30.5) 7.441,30.52 9.48,30.52 U2.2 10.44,30.54 10.7,30.8 10.7,34.9 8.5,37.1 ; v2(7.5,20) 9.31,20 U3.2 ; R3.1@7.8,37.3 R3.1@7.75,37.25 ; U1.3 10.735,41.665 11.4,41 11.4,40.207 8.5,37.1 ; R3.1@7.75,37.25 7.6,37.4 R3.1 R3.1@7.75,37.25 ; R3.1@7.75,37.25 7.9,37.1 8.5,37.1
  Bottom Layer w0.3: v2(7.5,20) 7.5,20.7 6.142,22.058 6.142,29.221 v2(7.421,30.5) v2@7.9,30.5
NetR3_2: R3.2 T1.1 | length 3.6
  Top Layer w0.3: R3.2@10.714,37.114 R3.2 10.721,37.079 T1.1 T1.1@14.229,37.114
NetR4_1: R4.1 R14.2 T1.3 | length 8.5
  Top Layer w0.3: T1.3 15.9,34.1 R4.1 R14.2 R14.2@20.45,31.6 ; R4.1@20.15,34.1 R4.1@20.3,33.95
NetR4_2: R4.2 T2.1 | length 4
  Top Layer w0.3: R4.2 26.8,34.1 27.122,33.778 T2.1@27.35,33.55
NetR7_1: R7.1 U3.3 | length 10.1
  Top Layer w0.3: U3.3 10.47,18.87 13.4,21.8 13.4,22.9 15.75,25.25 R7.1
NetR7_2: R7.2 T3.1 | length 2.2
  Top Layer w0.3: T3.1 18.729,23.714 18.729,25.679 R7.2
NetR11_2: R11.2 R13.1 U8.2 | length 10
  Top Layer w0.3: R13.1@35.55,30.6 R13.1 ; R13.1@35.75,30.7 36.8,30.7 36.9,30.7 37.4,31.2 37.4,34.5 38.4,35.5 R11.2 39.08,35.27 U8.2
NetR12_2: R12.2 U8.3 | length 3
  Top Layer w0.3: R12.2 39.05,33.4 40.44,33.4 41.04,34 U8.3
NetR16_1: R16.1 TO1.2 | length 9.9
  Top Layer w0.3: TO1.2 57.1,29.7 60.9,25.9 60.9,23 60.6,22.7 R16.1
NetR16_2: R16.2 R17.1 U9.6 | length 6
  Top Layer w0.3: U9.6 52.835,23.365 R17.1 54,22.4 56.3,22.4 R16.2
NetR17_2: R17.2 R18.2 U9.7 | length 5.8
  Top Layer w0.3: U9.7 52.835,24.635 53.6,25.4 R17.2 56.3,25.4 R18.2
NetR18_1: R18.1 TO1.1 | length 8.2
  Top Layer w0.3: TO1.1 54.56,29.3 54.6,29.26 54.6,28.6 55.142,28.058 56.999,28.058 59.5,25.557 59.5,25.3 R18.1
NetR19_1: R19.1 R20.1 U10.7 | length 8.6
  Top Layer w0.3: R20.1 60.45,44.1 60.75,43.8 62.05,43.8 63.55,42.3 R19.1 63.85,41.7 63.85,38.14 U10.7
NetR19_2: R19.2 TO1.4 | length 3.2
  Top Layer w0.3: TO1.4 60.15,39.66 60.15,41.7 R19.2
NetR21_1: R21.1 T4.2 | length 2.2
  Top Layer w0.3: R21.1 63.65,21.7 T4.2
NetR22_1: R22.1 T4.1 | length 2.1
  Top Layer w0.3: T4.1 65.55,21.8 R22.1
NetR22_2: R22.2 U10.3 | length 8.5
  Top Layer w0.3: U10.3 65.235,30.965 66.3,29.9 R22.2@66.3,24.9 ; R22.2@65.535,25.1 R22.2@65.9,25.1
NetT3_2: T3.2 U2.3 | length 17.5
  Top Layer w0.3: v2(7.4,28.7) 7.82,29.12 9.35,29.12 U2.3 ; v2(15.7,23.4) 16.357,23.4 T3.2
  Bottom Layer w0.3: v2(7.4,28.7) 7.4,24.4 7.8,24 15.1,24 v2(15.7,23.4)
NetT3_3: T3.3 U4.6 | length 6.2
  Top Layer w0.3: T3.3 19.542,21.558 19.896,21.558 19.931,21.593 22.193,21.593 23.12,22.52 U4.6
pads on no net: TO1.3 TO1.6 U5.4 U5.5 U6.4 U6.5 U7.1 U7.6 U7.7 U8.5

## Polygon pours and split planes (outlines as drawn)
GND on Top Layer "GND_L01_P016" (solid, pour order 16): 73,48.5 0,48.5 0,0 73,0
GND on Bottom Layer "GND_L02_P018" (solid, pour order 18): 73,48.5 0,48.5 0,0 73,0

## Keep-outs
Keep-Out Layer:
  the board outline again, w0.254

## Silkscreen, mask and mechanical layers (free items; w line width, h text height)
Drill Drawing:
  lines w0.254: -0.096,-3.354 -0.096,-2.846 ; 1.428,-3.608 -0.096,-3.1 ; 1.428,-2.592 -0.096,-3.1 ; 31.3,-3.1 -0.096,-3.1 ; 41.508,-3.1 72.904,-3.1 ; 71.38,-3.608 72.904,-3.1 ; 71.38,-2.592 72.904,-3.1 ; 72.904,-3.354 72.904,-2.846 ; 74.292,1.474 74.8,-0.05 ; 74.292,46.926 74.8,48.45 ; 74.546,-0.05 75.054,-0.05 ; 74.546,48.45 75.054,48.45 ; 74.8,17.7 74.8,-0.05 ; 74.8,30.701 74.8,48.45 ; 75.308,1.474 74.8,-0.05 ; 75.308,46.926 74.8,48.45
  text "48.5 (mm)" at 75.714,17.954 h1.52 r90
  text "73 (mm)" at 31.554,-4.014 h1.52